# Altium PCB PCB3.PcbDoc
Units mm, origin at the board's own origin, x right, y up, seen from the top; angles counter-clockwise.
Board outline 46.6 x 36.15 mm, 2 copper layers (Top Layer, Bottom Layer), stack 1.571 mm thick; 33 components, 32 nets, 94 pads, 9 vias.
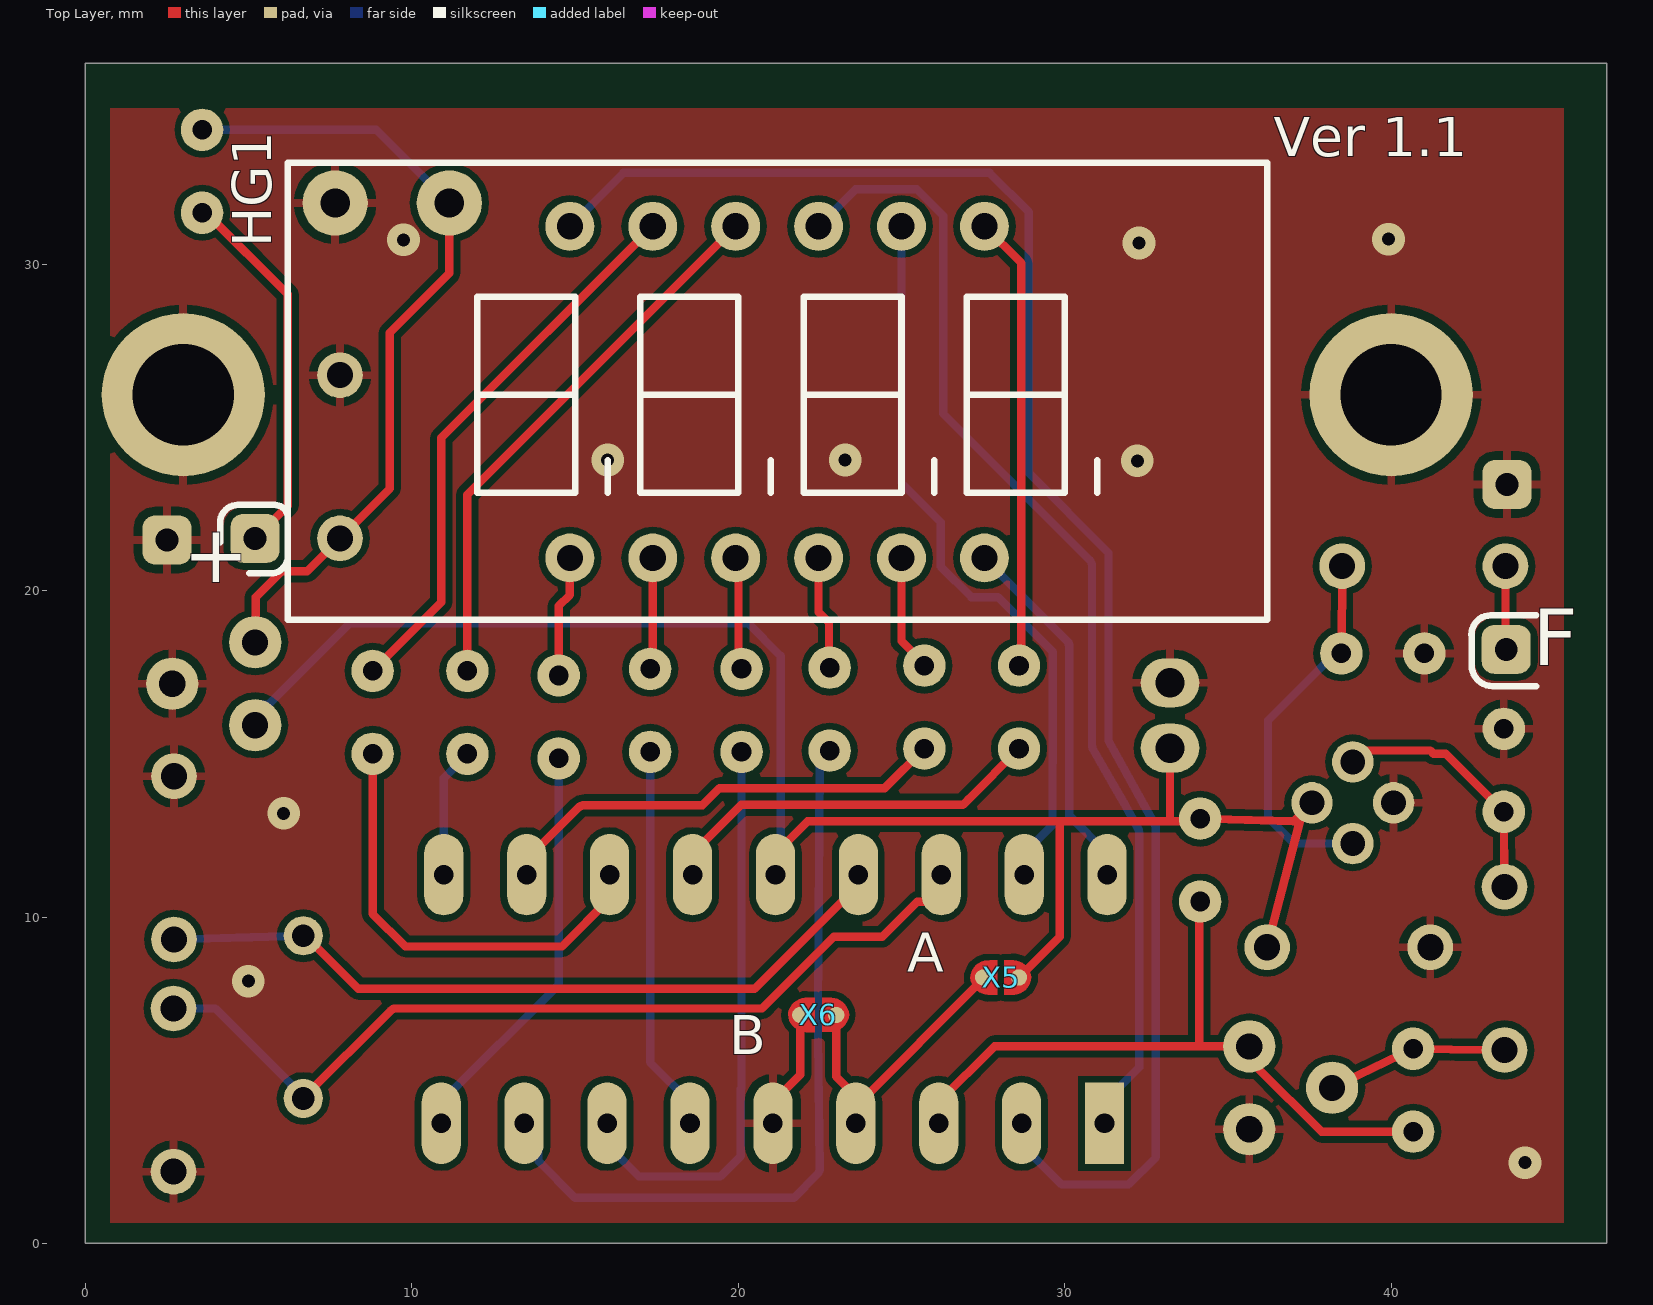
[diagram p0: Top Layer view]
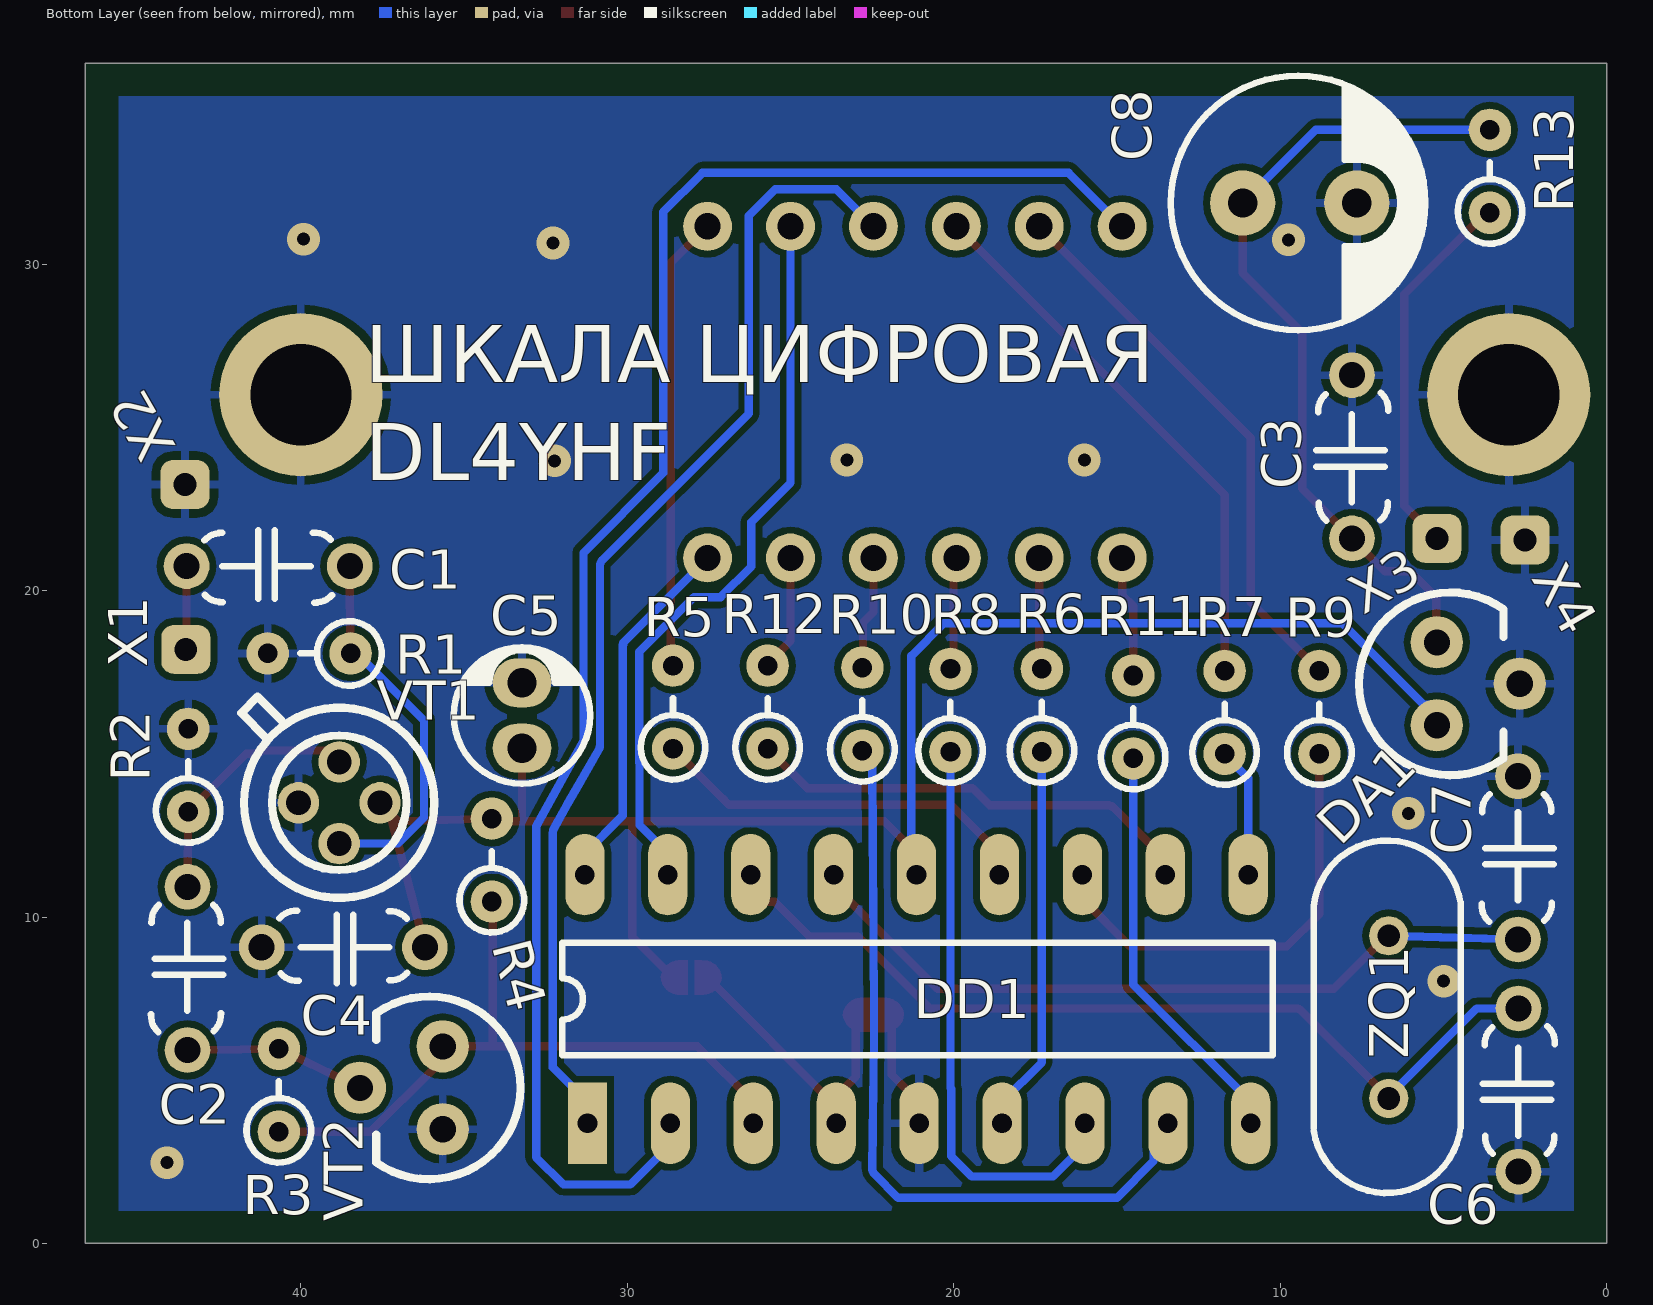
[diagram p1: Bottom Layer view, seen from below]
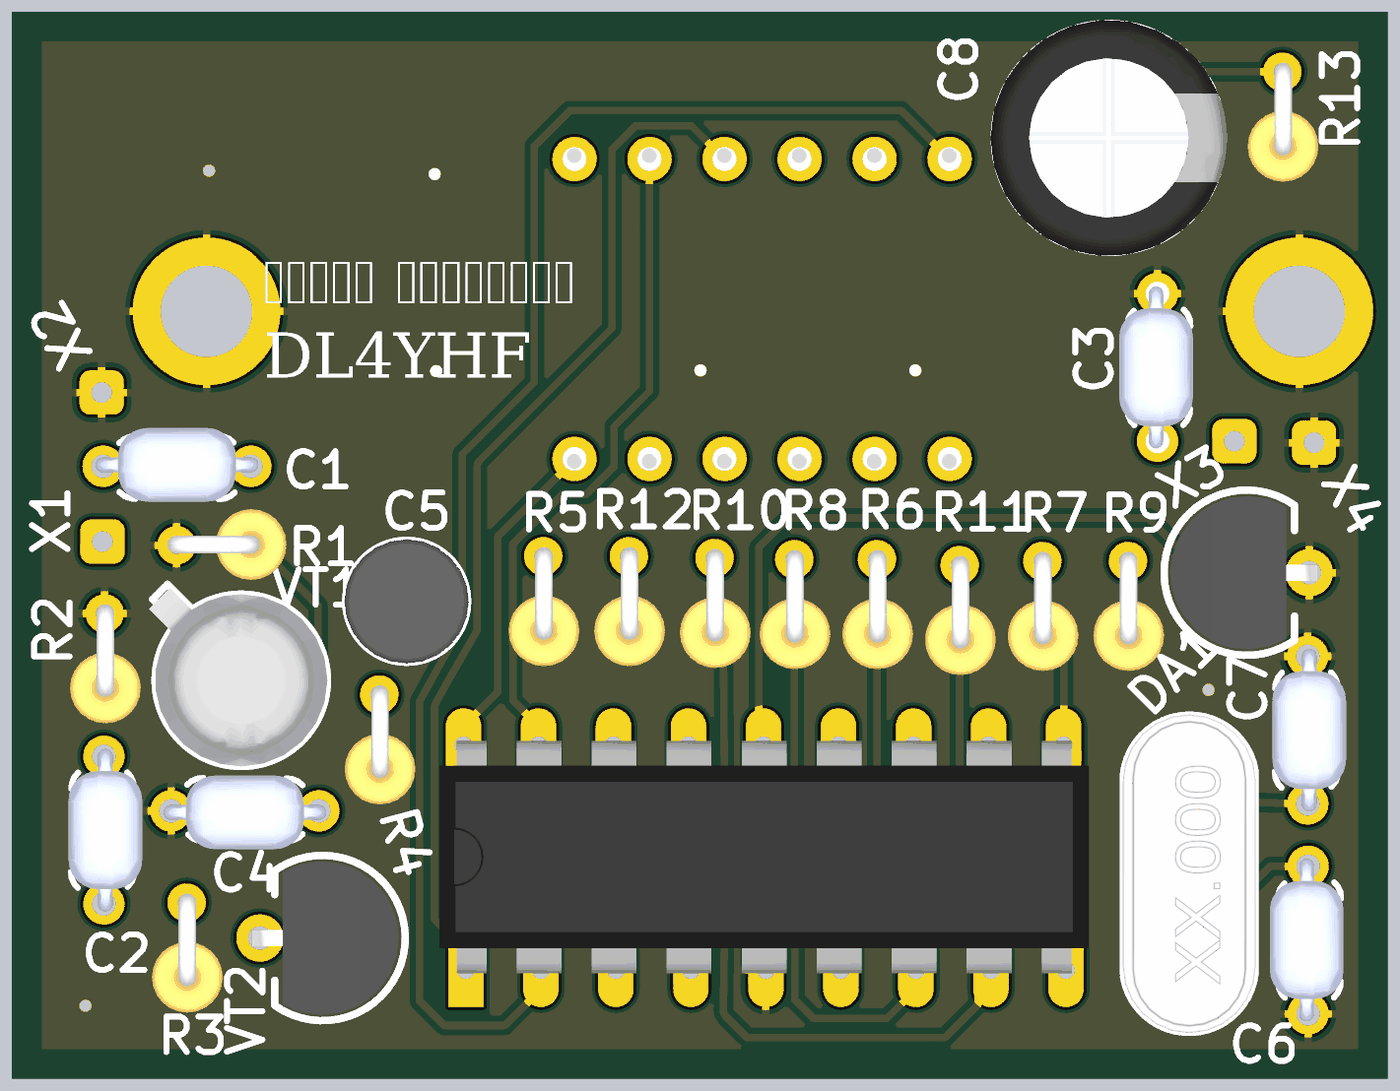
[diagram p2: 3D render of the assembled board from below, using the file's embedded part models]

## Layer stack, top to bottom
Top Solder: solder mask 0.0102, Solder Resist, Dk 3.5
Top Layer: signal copper 0.0356
Dielectric 1: dielectric 1.5, FR-4, Dk 4.8
Bottom Layer: signal copper 0.0356
Bottom Solder: solder mask 0.0102, Solder Resist, Dk 3.5

## Board outline
0,0 0,36.15 46.6,36.15 46.6,0

## Design rules (kind name [scope] priority, off if disabled: settings)
BoardOutlineClearance [All] p1: gap=0.4 ignorepadtopadclearanceinfootprint=FALSE
Clearance [All] p1: gap=0.2 ignorepadtopadclearanceinfootprint=FALSE except(0.125: Arc-Arc Arc-Track Arc-SMDPad Arc-THPad Arc-Via Arc-Text Track-Track Track-SMDPad Track-THPad Track-Via Track-Text SMDPad-Via SMDPad-Text THPad-THPad THPad-Via THPad-Text Via-Via Via-Text Fill-Text Poly-Text Region-Text Text-Text; 0.25: Arc-Hole Track-Hole SMDPad-Hole THPad-Hole Via-Hole Fill-Hole Poly-Hole Region-Hole Text-Hole)
ComponentClearance [All] p1: gap=0 collisioncheckmode=3 verticalgap=0.254 showdistances=FALSE
DiffPairsRouting [All] p1: maxlimit=0.254 minlimit=0.15 mostfreqgap=0.254 toplayer_minwidth=0.2 toplayer_maxwidth=0.381 toplayer_prefwidth=0.254 bottomlayer_minwidth=0.2 bottomlayer_maxwidth=0.381 bottomlayer_prefwidth=0.254 maxuncoupledlength=12.7
HoleSize [All] p1: absolutevalues=TRUE maxlimit=100 minlimit=0.3 maxpercent=80.000 minpercent=20.000
MinimumAnnularRing [All] p1: minimumring=0.15
MinimumSolderMaskSliver [All] p1: minsoldermaskwidth=0.15
PolygonConnect [All] p1: thpad.connectstyle=Relief thpad.reliefconductorwidth=0.254 thpad.reliefentries=4 thpad.polygonreliefangle="90 Angle" thpad.airgapwidth=0.254 smdpad.connectstyle=Relief smdpad.reliefconductorwidth=0.254 smdpad.reliefentries=4 smdpad.polygonreliefangle="90 Angle" smdpad.airgapwidth=0.254 via.connectstyle=Direct via.reliefconductorwidth=0.254 via.reliefentries=4 via.polygonreliefangle="90 Angle" via.airgapwidth=0.254
RoutingVias [All] p1: holewidth=0.4 width=0.8 viastyle="Through Hole" minholewidth=0.3 minwidth=0.8 maxholewidth=0.8 maxwidth=1.27
SilkToSilkClearance [All] p1 off: silktosilkclearance=0.15
SilkToSolderMaskClearance [IsPad] p1: minsilkscreentomaskgap=0.1 clearancetoexposedcopper=TRUE
SolderMaskExpansion [All] p1: expansion=0.102 istentingtop=FALSE
Width [All] p1: maxlimit=1 minlimit=0.125 preferedwidth=0.254
24 further rules are at their usual default settings.

## Components (designator, comment, footprint, x,y, rotation, side; value= is the part's Value field where it differs from the comment)
C1 "1000" К10-17Б 38.5,20.75 r0 bottom
C2 "0,1мк" К10-17Б 43.475,5.925 r90 bottom
C3 "0,1мк" К10-17Б 7.8,26.6 r270 bottom
C4 "0,1мк" К10-17Б 41.2,9.075 r180 bottom
C5 "47 мк" К50-35 33.025,16.175 r90 bottom
C6 "22" К10-17Б 2.7,7.2 r270 bottom
C7 "22" К10-17Б 2.714,9.313 r90 bottom
C8 "220 мк" "К50-35 - 8x11.5" 9.45,31.875 r180 bottom
DA1 "78L05" КТ-26 5.2,15.875 r90 bottom
DD1 "PIC16F628A" DIP18 31.22,3.68 r90 bottom
HG1 "FYQ-3641BG-21" FYQ-3641 25,21 r0 top locked
R1 "1М" R_C1-4_V 41.015,18.075 r180 bottom
R2 "470" R_C1-4_V 43.45,15.765 r270 bottom
R3 "100к" R_C1-4_V 40.675,5.965 r270 bottom
R4 "560" R_C1-4_V 34.15,13.015 r270 bottom
R5 "1 к" R_C1-4_V 28.6,17.7 r270 bottom
R6 "1 к" R_C1-4_V 17.3,17.6 r270 bottom
R7 "1 к" R_C1-4_V 11.7,17.54 r270 bottom
R8 "1 к" R_C1-4_V 20.1,17.6 r270 bottom
R9 "1 к" R_C1-4_V 8.8,17.54 r270 bottom
R10 "1 к" R_C1-4_V 22.8,17.64 r270 bottom
R11 "1 к" R_C1-4_V 14.5,17.4 r270 bottom
R12 "1 к" R_C1-4_V 25.7,17.7 r270 bottom
R13 "47" R_C1-4_V 3.575,34.115 r270 bottom
VT1 "KP303" KP303 37.575,13.5 r270 bottom
VT2 "BC547" КТ-26 35.652,6.038 r270 bottom
X1 "КТ" KT 43.525,18.2 r180 bottom
X2 "КТ" KT 43.55,23.25 r180 bottom
X3 "КТ" KT 5.2,21.6 r180 bottom
X4 "КТ" KT 2.5,21.55 r180 bottom
X5 "Solder_jumper" Solder_jumper 28.075,8.15 r180 top
X6 "Solder_jumper" Solder_jumper 22.425,7 r0 top
ZQ1 "20 M" HC-49 6.675,4.545 r90 bottom

## Footprints (in the part's own frame and the unit in brackets; to place one, negate y for a bottom-side part, rotate by r counter-clockwise, add the part's x,y. Pads: shape width x height; smd on the part's side, far side on the other; paste and mask are expansions set on the pad)
DIP18 [mm]
  rect 2.5x1.2 hole 0.6: 1(0,0)
  oval 2.5x1.2 hole 0.6: 2(0,-2.54) 3(0,-5.08) 4(0,-7.62) 5(0,-10.16) 6(0,-12.7) 7(0,-15.24) 8(0,-17.78) 9(0,-20.32) 10(7.62,-20.24) 11(7.62,-17.7) 12(7.62,-15.16) 13(7.62,-12.62) 14(7.62,-10.08) 15(7.62,-7.54) 16(7.62,-5) 17(7.62,-2.46) 18(7.62,0.08)
  silkscreen extent 2.08,-21 5.54,0.77, body extent -0.1,-21.1 7.77,0.9, height 5
FYQ-3641 [mm]
  round 1.5 hole 0.8: 1(-10.16,0) 2(-7.62,0) 3(-5.08,0) 4(-2.54,0) 5(0,0) 6(2.54,0) 7(2.54,10.16) 8(0,10.16) 9(-2.54,10.16) 10(-5.08,10.16) 11(-7.62,10.16) 12(-10.16,10.16)
  silkscreen extent -18.8,-1.9 11.2,12.1, body extent -18.8,-1.9 11.2,12.1, height 10.1
HC-49 [mm]
  round 1.2 hole 0.7: 1(-0.1,0) 2(4.88,0)
  silkscreen extent -3,-2.2 7.8,2.3, body extent -3,-2.2 7.8,2.3, height 3.5
KP303 [mm]
  round 1.27 hole 0.762: 1(1.25,-1.25) 2(-1.25,-1.25) 3(0,-2.5) 4(0,0)
  silkscreen extent -3.25,-4.25 2.91,1.67, body extent -3.13,-4.38 2.92,1.67, height 7.3
KT [mm]
  rrect50% 1.5x1.5 hole 0.7: 1(0,0)
R_C1-4_V [mm]
  round 1.3 hole 0.6: 1(0,0) 2(2.54,0)
  silkscreen extent 1,-0.99 3.49,0.99, body extent -0.31,-1.18 3.73,1.22, height 9.4
Solder_jumper [mm]
  rrect100% 0.5x0.5 smd: 1(-0.525,0) 2(0.575,0)
  Top Layer region: -0.075,0.525 -0.3,0.525 -0.518,0.497 -0.709,0.387 -0.843,0.212 -0.9,0 -0.9,0 -0.837,-0.216 -0.696,-0.392 -0.499,-0.5 -0.275,-0.525 -0.275,-0.525 -0.075,-0.525
  Top Layer region: 0.144,-0.519 0.369,-0.519 0.587,-0.491 0.777,-0.381 0.911,-0.207 0.969,0.006 0.969,0.006 0.906,0.222 0.765,0.398 0.567,0.506 0.344,0.531 0.344,0.531 0.144,0.531
К10-17Б [mm]
  round 1.4 hole 0.8: 1(0,0) 2(5,0)
  silkscreen extent 0.55,-1.1 4.45,1.12, body extent -0.25,-1.3 5.25,1.2, height 6.54
К50-35 [mm]
  oval 1.5x1.8 hole 0.9: 1(-1,0.2) 2(1,0.2)
  silkscreen extent -2.09,-1.89 2.09,2.29, body extent -2.11,-1.91 2.11,2.31, height 7.49
"К50-35 - 8x11.5" [mm]
  round 2 hole 0.9: 1(-1.7,0) 2(1.8,0)
  silkscreen extent -3.9,-3.9 3.9,3.9, body extent -4,-4 4,4, height 11.5
КТ-26 [mm] "Аналог TO-92 // Масса не более 1г //  LIV"
  round 1.6 hole 0.8: 1(0,0) 2(1.27,-2.54) 3(2.54,0)
  silkscreen extent -1.53,-2.04 4.07,2.38, body extent -1.33,-2.81 3.86,2.16, height 7.7

## Part data
C1 C2 C3 C4 C6 C7: library part C_К10-17Б
C5 C8: library part K50-35
DA1: library part 78L06
DD1: Manufacturer=Toshiba, Manufacturer Part Number=TB6600HG(O), Max Power Dissipation=3.2W, Max Supply Voltage=42V, Min Supply Voltage=8V, Nominal Supply Current=1.8-4.2mA, Output Current=4.5A, Package=HZIP25-P-1.00F, Switching Frequency=200kHz, Temperature="-30°C to +85°C", Temperature Range High=+85°C, Temperature Range Low=-30°C, Automotive=No, Category=IC, ComponentLink2Description=Datasheet, ComponentLink2URL=https://toshiba.semicon-storage.com/info/docget.jsp?did=14683&prodName=TB6600HG, Device Class L1="Integrated Circuits (ICs)", Device Class L2="Power Management ICs", Device Class L3="Motor Drivers", Digikey Description="IC MTR DRVR BIPOLAR 8-42V 25HZIP", Height=19.87mm, Lead Free=Yes, Manufacturer 1=Toshiba, Manufacturer Part Number 1=TB6600HG(O), Motor Type=Stepper, Mouser Description="Motor / Motion / Ignition Controllers & Drivers 2-phase stepping motor Drvr 50V", Number Of Outputs=4, Octopart=https://octopart.com/tb6600hg%28o%29-toshiba-24612481, RoHS=TRUE, Standoff Height=2.67mm
HG1: "4-х разр. светод. индикатор, зеленый, (ОА)"
R1 R2 R3 R4 R5 R6 R7 R8 R9 R10 R11 R12 R13: library part R_C1-4
ZQ1: library part HC-49

## Free pads (board coordinates)
  round 5 hole 3.1: 0(3,26) 0(40,26)

## Via types
v1: diameter 1, hole 0.4, Top Layer to Bottom Layer, tented both sides, 9 vias

## Nets (pads, with @x,y where several pads share a name; then routed paths per layer and width w, separated by ;. In a path a pad name is that pad's centre, name@x,y a point inside that pad or via, vN(x,y) a via of type N, cw(c..) or ccw(c..) an arc to the next point about the centre after c; other vN are vias at no path point)
A: DD1.12 R9.2 | length 13.9
  Top Layer w0.254: R9.2 8.8,10.1 9.8,9.1 14.6,9.1 16.06,10.56 DD1.12
B: DD1.13 R5.2 | length 12
  Top Layer w0.254: DD1.13 18.6,11.95 20.089,13.439 26.879,13.439 27.048,13.608 R5.2
C: DD1.8 R10.2 | length 23.8
  Bottom Layer w0.254: DD1.8 13.44,3.594 13.877,3.157 13.877,2.523 15,1.4 21.7,1.4 22.426,2.126 ccw(c22.246,2.305) 22.5,2.309 22.444,6.34 cw(c23.2,6.35) 22.444,6.35 22.444,7.1 cw(c23.2,7.1) 22.444,7.106 22.5,14.697 cw(c22.754,14.695) 22.574,14.874 R10.2
D: DD1.6 R6.2 | length 11.9
  Bottom Layer w0.254: R6.2 17.3,5.55 18.52,4.33 DD1.6
D1: DD1.2 HG1.12 | length 51.3
  Bottom Layer w0.254: HG1.12 16.479,32.799 27.701,32.799 28.9,31.6 28.9,23.6 31.344,21.156 31.344,15.4 32.789,12.779 32.789,2.639 31.955,1.805 29.905,1.805 28.79,2.92 28.68,2.92 DD1.2
D2: DD1.1 HG1.9 | length 35.1
  Bottom Layer w0.254: HG1.9 23.591,32.291 25.468,32.291 26.275,31.484 26.275,25.425 30.762,20.938 cw(c30.582,20.759) 30.836,20.759 30.836,15.258 ccw(c31.09,15.26) 30.869,15.134 31.578,13.904 31.836,13.455 cw(c31.616,13.328) 31.839,13.451 32.249,12.706 cw(c32.027,12.583) 32.281,12.583 32.281,5.391 31.22,4.33 DD1.1
D3: DD1.17 HG1.8 | length 22.6
  Bottom Layer w0.254: HG1.8 25,23.3 26.2,22.1 26.2,20.741 27.141,19.8 27.958,19.8 29.631,18.127 29.631,14.733 29.625,14.727 29.625,12.815 28.76,11.95 DD1.17
D4: DD1.18 HG1.6 | length 11.3
  Bottom Layer w0.254: HG1.6 27.54,20.985 30.125,18.4 30.125,18.351 30.139,18.337 30.139,13.111 31.3,11.95 DD1.18
DP: DD1.7 R8.2 | length 17.8
  Bottom Layer w0.254: DD1.7 15.98,3.03 16.961,2.049 19.449,2.049 20.079,2.679 20.079,4.736 20.1,4.757 R8.2
E: DD1.9 R11.2 | length 12.7
  Bottom Layer w0.254: DD1.9 10.9,4.33 14.501,7.931 14.501,14.859 R11.2
F: DD1.10 R7.2 | length 4
  Bottom Layer w0.254: DD1.10 10.98,14.262 11.7,14.982 R7.2
G: DD1.11 R12.2 | length 14.7
  Top Layer w0.254: DD1.11 13.631,11.411 13.631,11.777 cw(c13.885,11.776) 13.704,11.954 15.101,13.351 cw(c15.28,13.171) 15.279,13.425 ; 15.28,13.425 18.903,13.425 19.425,13.947 24.487,13.947 R12.2
  Bottom Layer w0.254: DD1.11 DD1.11@13.52,11.95
GND: C3.1 C4.1 C5.2 C6.2 C7.2 C8.2 DA1.2 DD1.5 pad.0 R1.1 R2.1 VT1.3 VT2.3 X2.1 X4.1 X6.1 | length 3.7
  Top Layer w0.254: DD1.5 21.06,4.33 21.9,5.17 X6.1
  other v1: 44.1,2.475 4.993,8.036 6.075,13.175 32.225,23.975 16,24 23.275,24 32.275,30.65 9.744,30.744 39.917,30.767
NetC1_1: C1.1 R1.2 VT1.1 | length 11.7
  Top Layer w0.254: R1.2@38.485,18.075 C1.1
  Bottom Layer w0.254: R1.2 38.275,18.075 36.225,16.025 36.225,13.05 37.025,12.25 VT1.1
NetC1_2: C1.2 X1.1 | length 2.6
  Top Layer w0.254: C1.2 43.5,18.575 X1.1
NetC2_1: C2.1 R3.1 VT2.2 | length 6.1
  Top Layer w0.254: VT2.2@38.042,4.937 cw(c38.272,5.044) VT2.2@38.105,5.235 ; VT2.2@38.042,4.936 ccw(c38.272,5.044) 38.096,4.861 VT2.2 R3.1 41.831,5.939 ccw(c41.836,6.193) 41.833,5.939 C2.1
NetC2_2: C2.2 R2.2 VT1.2 | length 7.8
  Top Layer w0.254: VT1.2 39.175,15.1 41.2,15.1 41.3,15 41.675,15 R2.2 C2.2
NetC3_2: C3.2 C8.1 DA1.3 R13.1 | length 24.8
  Top Layer w0.254: DA1.3@5.24,18.47 5.22,18.49 5.22,19.801 6.01,20.591 6.791,20.591 C3.2 9.325,23.125 9.325,27.9 11.15,29.725 C8.1
  Bottom Layer w0.254: R13.1 8.91,34.115 C8.1
NetC6_1: C6.1 DD1.16 ZQ1.1 | length 28
  Top Layer w0.254: ZQ1.1@6.7,4.48 9.346,7.126 cw(c9.525,6.946) 9.524,7.2 20.725,7.2 22.925,9.4 24.415,9.4 25.484,10.469 25.783,10.469 26.22,10.906 DD1.16 ; DD1.16@26.22,10.65 DD1.16@26.24,11
  Bottom Layer w0.254: C6.1 3.98,7.2 ZQ1.1@6.7,4.48
NetC7_1: C7.1 DD1.15 ZQ1.2 | length 23
  Top Layer w0.254: ZQ1.2@6.7,9.46 8.36,7.8 20.5,7.8 DD1.15@23.7,11
  Bottom Layer w0.254: C7.1 3.192,9.326 5.086,9.38 ZQ1.2@6.665,9.425 ; ZQ1.2 ZQ1.2@6.665,9.425 ; ZQ1.2@6.7,9.46 ZQ1.2@6.665,9.425
NetDD1_3: DD1.3 R3.2 R4.2 VT2.1 | length 21.7
  Top Layer w0.254: DD1.3 26.14,4.33 27.848,6.038 34.125,6.038 ; R4.2 34.125,10.45 34.125,6.038 ; R3.2 37.865,3.425 35.91,5.38 35.91,5.78 VT2.1 34.125,6.038
NetDD1_4: DD1.4 X5.2 X6.2 | length 9.1
  Top Layer w0.254: X6.2 23,5.117 23.6,4.517 DD1.4@23.6,4.2 ; DD1.4 DD1.4@23.6,4.2 ; X5.2 27.5,8.1 DD1.4@23.6,4.2
NetHG1_1: HG1.1 R11.1 | length 3.7
  Top Layer w0.254: R11.1 14.5,19.529 14.84,19.869 HG1.1
NetHG1_2: HG1.2 R6.1 | length 3.4
  Top Layer w0.254: R6.1 17.38,17.68 HG1.2
NetHG1_3: HG1.3 R8.1 | length 3.5
  Top Layer w0.254: HG1.3 20.01,20.91 20.01,17.69 R8.1
NetHG1_4: HG1.4 R10.1 | length 3.7
  Top Layer w0.254: HG1.4@22.63,20.83 HG1.4 22.46,19.34 22.779,19.021 22.779,17.661 R10.1
NetHG1_5: HG1.5 R12.1 | length 3.6
  Top Layer w0.254: HG1.5 25,18.458 25.7,17.758 R12.1
NetHG1_7: HG1.7 R5.1 | length 14
  Top Layer w0.254: HG1.7 28.671,30.029 28.671,17.771 R5.1
NetHG1_10: HG1.10 R7.1 | length 17
  Top Layer w0.254: R7.1 11.7,22.94 HG1.10
NetHG1_11: HG1.11 R9.1 | length 17.2
  Top Layer w0.254: R9.1 10.9,19.64 10.9,24.68 HG1.11
NetR13_2: R13.2 X3.1 | length 12.2
  Top Layer w0.254: R13.2 3.701,31.575 6.2,29.076 6.2,22.6 X3.1
  Bottom Layer w0.254: X3.1@4.73,21.13 X3.1
VCC: C4.2 C5.1 DA1.1 DD1.14 R4.1 VT1.4 X5.1 | length 53.4
  Top Layer w0.254: DD1.14 21.14,11.95 22.121,12.931 29.825,12.931 ; X5.1 29.85,9.4 29.85,12.906 29.825,12.931 ; C5.1 33.225,12.931 ; R4.1 cw(c33.961,13.185) 33.961,12.931 33.225,12.931 ; R4.1@34.488,13 37.005,12.93 ; C4.2 37.2,12.925 37.005,12.93 ; VT1.4 37.005,12.93 ; 29.825,12.931 33.225,12.931
  Bottom Layer w0.254: DA1.1@5.3,16.5 5.6,16.5 8.1,19 20.3,19 21.3,18 21.3,11.46 DD1.14

## Polygon pours and split planes (outlines as drawn)
GND on Bottom Layer "Bottom Layer-No Net" (solid, pour order 0): 1,1 1,35.15 45.575,35.15 45.575,1
GND on Top Layer "Bottom Layer-No Net" (solid, pour order 2): 0.766,0.63 0.766,34.78 45.291,34.78 45.291,0.63

## Silkscreen, mask and mechanical layers (free items; w line width, h text height)
Top Overlay:
  lines w0.2: 4.125,21.475 4.125,22.075 cw(c4.675,22.075) 4.675,22.625 5.8,22.625 cw(c5.8,22.225) 6.2,22.225 6.2,21.05 cw(c5.675,21.05) 5.675,20.525 5.025,20.525 ; 42.459,18.649 cw(c43.051,18.649) 43.051,19.241 44.438,19.241 ; 42.463,18.674 42.463,17.72 ccw(c43.112,17.72) 43.112,17.07 ; 43.112,17.066 44.438,17.066
  text "Ver 1.1" at 36.4,33.3 h1.2
  text "+" at 3,19.675 h3
  text "F" at 44.338,17.141 h3
  text "A" at 25.175,8.325 h1.2
  text "B" at 19.725,5.8 h1.2
Bottom Overlay:
  text "ШКАЛА ЦИФРОВАЯ / DL4YHF" at 38.025,22.8 h3
Mechanical 2:
  the board outline again, w0.2